# Altium PCB powerdriver.PcbDoc (part 2 of 2)
Units mil, origin at the board's own origin, x right, y up, seen from the top; angles counter-clockwise.
Board outline 9161.49 x 7551.49 mil, 2 copper layers (Top Layer, Bottom Layer); 98 components, 95 nets, 352 pads, 131 vias.
Unrouted connection lines stored in the file: 6.
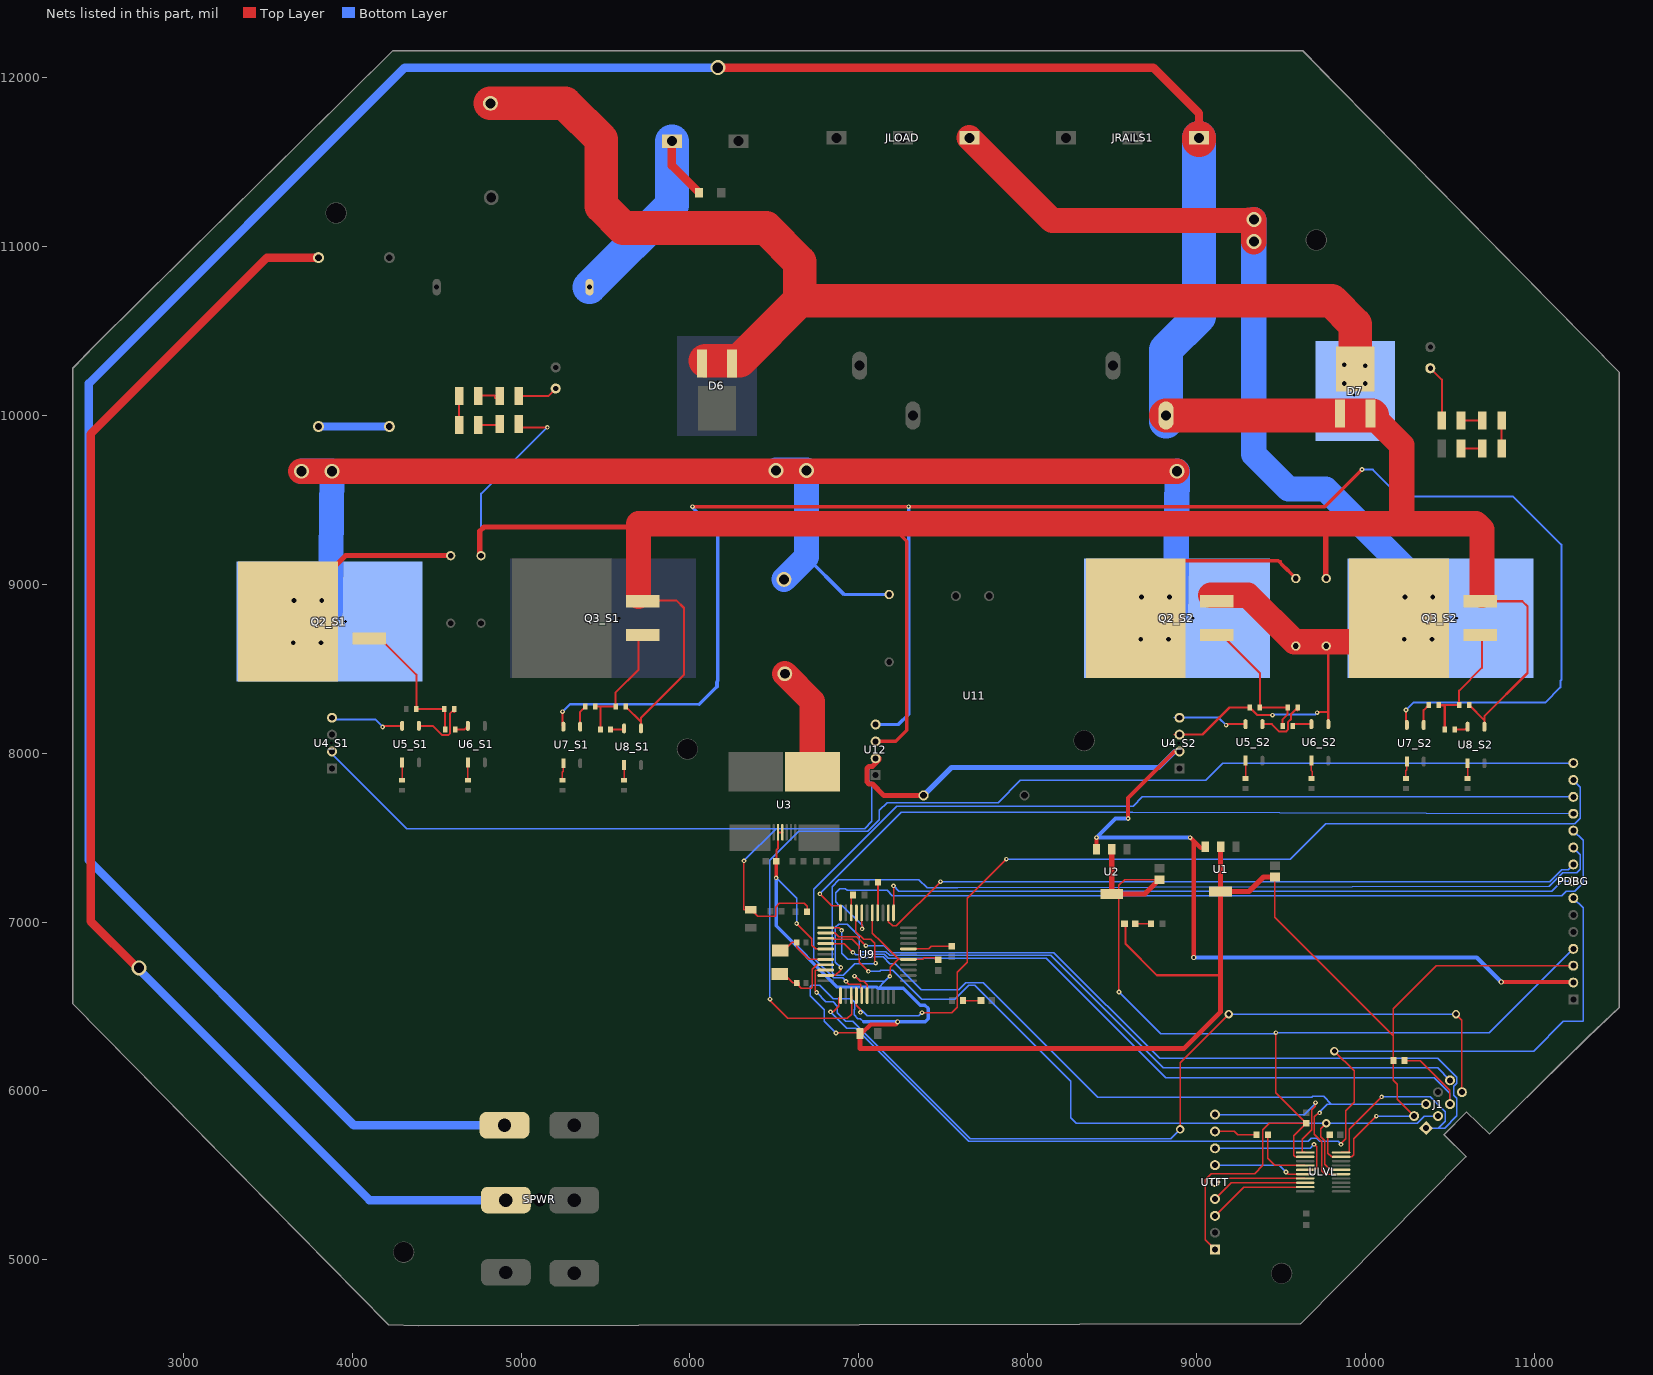
[diagram p2: the nets of this part, all layers, seen from the top]

## Via types
v1: diameter 27.56, hole 11.81, Top Layer to Bottom Layer, 85 vias
v2: diameter 50, hole 28, Top Layer to Bottom Layer, 29 vias
v3: diameter 88.58, hole 60, Top Layer to Bottom Layer, 14 vias
v4: diameter 30, hole 15, Top Layer to Bottom Layer, 3 vias

## Nets (pads, with @x,y where several pads share a name; then routed paths per layer and width w, separated by ;. In a path a pad name is that pad's centre, name@x,y a point inside that pad or via, vN(x,y) a via of type N, cw(c..) or ccw(c..) an arc to the next point about the centre after c; other vN are vias at no path point) (continued)
LOAD_S2: D1_S2.1 D2_S2.2 JLOAD.1 Q2_S2.3 Q3_S2.2 R7_S2.1 U4_S2.3 U6_S2.3 | length 8983.2
  Top Layer w8: Q2_S2.3@9085,8935 9085,8901.02 Q2_S2.3@9110.71,8901.02 ; D2_S2.2@9768.43,8635 9793.43,8660 9910,8660 10210.55,8660 10210.55,8800.63 10233.92,8800.63 10233.92,8914 Q3_S2.2@10245.55,8925.63 ; U6_S2.3@9780.55,8154.45 U6_S2.3@9780.55,8172.17 U6_S2.3@9780.55,8185
  Top Layer w12: U4_S2.3@8870.55,8110.63 9035.55,8110.63 9195.55,8270.63 R7_S2.1@9316.02,8270.63 9361.65,8225 v1(9450,8225) ; v1(9715,8240) 9720,8245 9780.55,8245 ; U6_S2.3@9780.55,8185 9780.55,8245 ; D2_S2.2@9780.55,8635 9780.55,8245
  Top Layer w25: D2_S2.2@9768.43,8635 D2_S2.2@9780.55,8635
  Top Layer w150: JLOAD.1@7655,11645 8145,11155 9260,11155 v3(9340,11160) v3(9340,11030) ; Q2_S2.3@9085,8935 9110.71,8935 9305,8935 9580,8660 9588.43,8660 9768.43,8660 9793.43,8660 Q3_S2.2@9910,8660
  Bottom Layer w8: D1_S2.1@9588.43,8635 D2_S2.2@9768.43,8635 ; Q3_S2.2@10245.55,8925.63 Q3_S2.2@10385.55,8925.63 ; Q3_S2.2@10385.55,8910 Q3_S2.2@10385.55,8925.63 ; Q3_S2.2@10405.55,8675.63 10356.92,8627 10289.18,8627 10285.55,8630.63 10240.55,8675.63 10365.55,8800.63 10455.55,8800.63 Q3_S2.2@10550.55,8800.63 ; Q3_S2.2@10410.55,8925.63 Q3_S2.2@10385.55,8925.63
  Bottom Layer w12: v1(9450,8225) 9455,8230 9705,8230 v1(9715,8240)
  Bottom Layer w150: v3(9340,11160) v3(9340,11030) 9340,9770 9545,9565 9765,9565 10385.55,8944.45 Q3_S2.2@10385.55,8925.63
  other v2: 10230,8675 10395,8675 10235,8925 10400,8925
LOW_RAIL: C14.2 D2_S1.1 D2_S2.1 D7.1 D7.3 JRAILS1.1 Q3_S1.3 Q3_S2.3 R11_S1.1 R11_S2.1 R22.1 SPWR.2 U8_S1.3 U8_S2.3 U12.3 | length 31306.6
  Top Layer w8: D2_S1.1@4755,9170 D2_S1.1@4758.94,9173.94 ; Q3_S1.3@5695.16,8891.02 Q3_S1.3@5695.16,8905 ; Q3_S1.3@5695.16,8917.5 Q3_S1.3@5695.16,8905 ; Q3_S1.3@5695.16,8930 Q3_S1.3@5695.16,8905 ; 5695.16,9340 5900,9340 ; 9250,9350 9775.55,9350 ; 9765.55,9305 9775.55,9305 9775.55,9350 ; 9841.57,9920 D7.1@9841.57,10000 ; 10655.55,9350 9775.55,9350 ; Q3_S2.3@10690.71,8901.02 Q3_S2.3@10690.71,8935
  Top Layer w12: R22.1@5002.09,9930 v1(5155,9930) ; R11_S1.1@5619.53,8275.63 5710,8185.16 ; Q3_S1.3@5695.16,8905 5920,8905 5965,8860 5965,8465 5710,8210 5710,8185.16 ; U8_S1.3@5710,8147.17 5710,8185.16 ; R11_S2.1@10615.08,8285.63 10705.55,8195.16 ; Q3_S2.3@10690.71,8901.02 10690.71,8900 10930.55,8900 10960.55,8870 10960.55,8475 10705.55,8220 10705.55,8195.16 ; U8_S2.3@10705.55,8157.17 10705.55,8195.16
  Top Layer w20: U12.3@7120,8070 7220,8070 7285,8135 7285,9255 7180,9360
  Top Layer w30: D2_S1.1@4755,9170 4755,9315 4780,9340 4987.09,9340 5695.16,9340 ; 9765.55,9305 9765.55,9035 D2_S2.1@9768.43,9035 ; 9765.55,9360 9775.55,9350 ; 10655.55,9350 10690.71,9314.84
  Top Layer w50: v3(6165,12060) 8745,12060 9015,11790 JRAILS1.1@9015,11645
  Top Layer w150: Q3_S1.3@5695.16,8930 5695.16,9340 5695.16,9360 7180,9360 9765.55,9360 10655.71,9360 10690.71,9325 10690.71,9314.84 Q3_S2.3@10690.71,8935 ; D7.3@10040,10000 10215,9825 10215,9385
  Top Layer w200: C14.2@8820,10000 9841.57,10000 D7.3@10038.43,10000 ; JRAILS1.1@9015,11630 JRAILS1.1@9015,11645 ; D7.3@10038.43,9998.43 D7.3@10038.43,10000 ; D7.3@10040,10000 D7.3@10038.43,10000
  Bottom Layer w12: D2_S1.1@4762.87,9170 4762.87,9537.87 v1(5155,9930)
  Bottom Layer w50: SPWR.2@4881.61,5796.54 4008.46,5796.54 2440,7365 2440,10190 4310,12060 v3(6165,12060)
  Bottom Layer w200: C14.2@8820,9965 C14.2@8820,10000 8820,10390 9015,10585 JRAILS1.1@9015,11645
LOW_RAIL+12: U7_S1.4 U7_S2.4 U12.4 | length 10974
  Top Layer w12: v1(5245,8245.63) 5245,8162.17 U7_S1.4@5250,8157.17 ; v1(10240.55,8255.63) 10240.55,8172.17 U7_S2.4@10245.55,8167.17
  Top Layer w20: v1(6015.55,9460) v1(7295,9460) 9760,9460 v1(9980,9680)
  Bottom Layer w8: 6160,8420 6160,8430 6165,8430
  Bottom Layer w12: v1@5250,8250.63 v1(5245,8245.63) 5289.37,8290 6055,8290 ; v1(9980,9680) 10045,9680 10205,9520 10875.55,9520 11160.55,9235 11160.55,8435 11155.55,8430 11155.55,8390.55 11065,8300 10284.92,8300 v1(10240.55,8255.63) v1@10245.55,8260.63
  Bottom Layer w20: v1@6010,9460 6012.78,9457.22 6165,9305 6165,8430 ; 6055,8290 6160,8395 ; U12.4@7120,8170 7235,8170 7295,8230 v1(7295,9460)
  Bottom Layer w25: 6160,8395 6160,8420
MISO: J1.1 U9.2 ULVL.20 | length 5532.5
  Top Layer w8: U9.2@6803.98,6935.7 6859,6935.7 6880.7,6914 6988,6914 v1(7042,6860) ; ULVL.20@9856.3,5635.16 9905,5635.16 9905,5773 v1(10097,5965)
  Bottom Layer w8: v1(7042,6860) 7152,6860 7193,6819 8156,6819 8782,6193 10429.99,6193 10542.95,6080.04 10542.95,6045.64 10525,6027.69 10525,5975 10543,5957 10543,5853 10470,5780 10432,5780 ; v1(10097,5965) 10384,5965 10473,5876 10473,5821 10432,5780 ; J1.1@10360,5780 10432,5780
MOSI: J1.4 U9.1 ULVL.15 | length 4723.7
  Top Layer w8: U9.1@6803.98,6966.7 6883.3,6966.7 v1(6899,6951) ; v1(9730,5870) 9723,5870 9699,5846 9699,5743.37 9743,5699.37 9743,5527.2 9763,5507.2 ULVL.15@9856.3,5507.2
  Bottom Layer w8: v1(6899,6951) 6899,6816 6936,6779 7007,6779 7017,6789 7079.67,6789 7084.25,6793.57 7143.43,6793.57 7184,6753 7216,6753 7370.45,6598.55 7591.89,6598.55 7634.34,6641 7736,6641 8416,5961 9683.67,5961 9689.67,5967 9753,5967 9798.58,5921.42 ; v1(9730,5870) 9723,5870 9726.5,5873.5 9774.42,5921.42 9798.58,5921.42 ; J1.4@10360,5921.42 9798.58,5921.42
NetC7_2: C7.2 U9.7 X1.2 | length 349.6
  Top Layer w8: X1.2@6533.94,6831.58 6558,6831.58 6606.42,6880 C7.2@6632.44,6880 6632.44,6850 6703.74,6778.7 U9.7@6803.98,6778.7
NetC8_2: C8.2 U9.8 X1.1 | length 437.7
  Top Layer w8: X1.1@6532.95,6692.8 6556,6692.8 6608.8,6640 C8.2@6632.44,6640 6648.44,6640 6648.44,6618.56 6659,6608 6717,6608 6724,6615 6724,6720 6750.7,6746.7 U9.8@6803.98,6746.7
NetC11_1: C11.1 U9.29 | length 262.6
  Top Layer w8: U9.29@7293.98,6840.7 7414,6840.7 7429.8,6856.5 C11.1@7550,6856.5
NetD1_S1_2: D1_S1.2 D1_S2.2 D3.1 L1.1 Q2_S1.2 Q2_S2.2 | length 13288.7
  Top Layer w8: Q2_S1.2@3665,8665.63 3635,8695.63 3635,8790.63 3635,8883 3670,8883 Q2_S1.2@3670,8915.63 ; Q2_S1.2@3860,8905.63 Q2_S1.2@3860,9070 ; 4460,9670 4883,9670 ; v3@6510,9670 6505,9670 v3(6510,9675) ; Q2_S2.2@8660.55,8675.63 8660.55,8675 8630.55,8675 8630.55,8800.63 8630.55,8893 8665.55,8893 Q2_S2.2@8665.55,8925.63 ; Q2_S2.2@8825.55,8675.63 8825.55,8800.63 Q2_S2.2@8825.55,8925.63 ; Q2_S2.2@8830.55,8925.63 8895.55,8990.63 Q2_S2.2@8895.55,9105 ; Q2_S2.2@8910.55,9120 Q2_S2.2@8910.55,9140 ; Q2_S2.2@8931.38,9101.63 Q2_S2.2@8931.46,9101.54 ; 9485,9140 9503.43,9140 9503.43,9121.57 9503.43,9120
  Top Layer w20: Q2_S2.2@8895.55,9105 Q2_S2.2@8910.55,9120 ; Q2_S2.2@8910.55,9140 9485,9140 9503.43,9121.57 9545,9080 ; 9503.43,9120 D1_S2.2@9588.43,9035
  Top Layer w30: Q2_S1.2@3860,9070 3960,9170 D1_S1.2@4582.87,9170 D1_S1.2@4590,9170
  Top Layer w150: v3@3695,9670 v3(3700,9670) v3(3880,9670) 4883,9670 v3@6505,9670 ; v3@6510,9670 6690,9670 8344,9670 v3@8884.95,9670
  Bottom Layer w8: Q2_S1.2@3665,8665.63 Q2_S1.2@3830,8665.63 ; Q2_S1.2@3670,8915.63 3835,8915.63 3870,8915.63 3870,8840 3880,8830 Q2_S1.2@3880,8790.63 ; Q2_S2.2@8660.55,8675.63 Q2_S2.2@8825.55,8675.63 ; Q2_S2.2@8830.55,8925.63 8830.55,9615 v3(8885.55,9670) ; Q2_S2.2@8875.55,8800.63 8893,8800.63 8893,8840 Q2_S2.2@8875.55,8840
  Bottom Layer w20: 6690,9162.48 6912.48,8940 D3.1@7180,8940
  Bottom Layer w150: v3(3700,9670) v3(3880,9670) 3870.91,8915.2 Q2_S1.2@3870,8840 ; v3(6510,9675) v3(6690,9675) 6690,9162.48 L1.1@6556.89,9029.37 ; Q2_S2.2@8875.55,8840 8876.57,8924.56 Q2_S2.2@8876.58,8925.07 ; Q2_S2.2@8876.58,8925.08 v3(8885.55,9670)
  other v2: 3650,8655 3815,8655 8670,8675 8835,8675 3655,8905 3820,8905 8675,8925 8840,8925
NetD4_2: D4.2 R13.1 | length 105
  Top Layer w8: R13.1@7618.46,6535 D4.2@7723.5,6535
NetD5_1: D5.1 F1.2 J_ACPWR1.2 | length 1438.5
  Top Layer w50: J_ACPWR1.2@5893.15,11625 5893.15,11480.51 D5.1@6053.66,11320
  Bottom Layer w200: F1.2@5405.51,10760 5893.15,11247.64 J_ACPWR1.2@5893.15,11625
NetD6_1: D6.1 D6.3 D7.4 L2.1 | length 7274.7
  Top Layer w8: D6.3@6090,10325 6081.57,10316.57 6081.57,10307.48 6099.09,10325 6148,10373.91 6212,10373.91 6260.91,10325 D6.1@6278.43,10307.48
  Top Layer w200: L2.1@4818.15,11849.37 5260.63,11849.37 5475,11635 5475,11240 5605,11110 6450,11110 6650,10910 6650,10680 ; D6.3@6090,10325 6099.09,10325 6260.91,10325 6295,10325 6650,10680 ; D7.4@9940,10275.55 9940,10540 9800,10680 6650,10680
  other v2: 9875,10190 10000,10190 10000,10295 9875,10300
NetD8_2: D8.2 R28.1 | length 95
  Top Layer w8: D8.2@8636.5,6990 R28.1@8731.54,6990
NetDLAMPHI_2: DLAMPHI.2 R21.2 | length 338.1
  Top Layer w12: DLAMPHI.2@10385,10280 10452.91,10212.09 R21.2@10452.91,9970
NetDLAMPLO_2: DLAMPLO.2 R25.1 | length 236.6
  Top Layer w8: R25.1@4987.09,10115 R25.1@4997.09,10115
  Top Layer w12: R25.1@4997.09,10115 5160,10115 DLAMPLO.2@5205,10160
NetL1_2: L1.2 U3.9 | length 648.2
  Top Layer w150: L1.2@6561.89,8470.63 6725,8307.52 U3.9@6725,7890
NetQ2_S1_1: Q2_S1.1 R5_S1.2 R7_S1.2 R29_S1.2 | length 827.7
  Top Layer w12: Q2_S1.1@4137.38,8707.38 4379.53,8465.24 R7_S1.2@4379.53,8260.63 R5_S1.2@4545,8260.63 ; R29_S1.2@4550.47,8140 R5_S1.2@4550.47,8255.16
NetQ2_S2_1: Q2_S2.1 R5_S2.2 R7_S2.2 R29_S2.2 | length 856.9
  Top Layer w8: Q2_S2.1@9110.71,8700.24 9145.16,8700.24 Q2_S2.1@9145.16,8705.16
  Top Layer w12: Q2_S2.1@9145.16,8705.16 9375.08,8475.24 R7_S2.2@9375.08,8270.63 9540,8270.63 9540,8230 9510.47,8200.47 R29_S2.2@9510.47,8160
NetQ3_S1_1: Q3_S1.1 R9_S1.2 R11_S1.2 R30_S1.2 | length 760.9
  Top Layer w12: R9_S1.2@5439.53,8275.63 R11_S1.2@5560.47,8275.63 5560.47,8360.47 5695.16,8495.16 5695.16,8690.24 Q3_S1.1@5695.16,8729.61 ; R30_S1.2@5470.47,8140 5470.47,8270.16
NetQ3_S2_1: Q3_S2.1 R9_S2.2 R11_S2.2 R30_S2.2 | length 772.4
  Top Layer w8: R9_S2.2@10435.08,8285.63 10435.08,8282 10470.47,8282 10470.47,8280.16
  Top Layer w12: R9_S2.2@10435.08,8285.63 R11_S2.2@10556.02,8285.63 10556.02,8370.47 10690.71,8505.16 Q3_S2.1@10690.71,8700.24 ; R30_S2.2@10470.47,8140 10470.47,8280.16
NetR1_2: R1.2 U9.37 | length 180.9
  Top Layer w10: U9.37@7111.98,7054.7 7113.46,7056.19 R1.2@7113.46,7235
NetR4_S1_2: R4_S1.2 U5_S1.1 | length 105.5
  Top Layer w8: R4_S1.2@4295,7840.16 U5_S1.1@4295,7945.63
NetR4_S2_2: R4_S2.2 U5_S2.1 | length 105.5
  Top Layer w8: R4_S2.2@9290.55,7850.16 U5_S2.1@9290.55,7955.63
NetR5_S1_1: R5_S1.1 U5_S1.3 | length 381.3
  Top Layer w12: U5_S1.3@4395,8162.17 4477.01,8162.17 4530.89,8108.28 4570.05,8108.28 4578.25,8116.48 4578.25,8234.83 R5_S1.1@4604.06,8260.63 R5_S1.1@4604.06,8243.11
NetR5_S2_1: R5_S2.1 U5_S2.3 | length 346.4
  Top Layer w12: U5_S2.3@9390.55,8172.17 9447.01,8172.17 9490.89,8128.28 9530.05,8128.28 9541.75,8139.98 9541.75,8183.52 9560,8201.77 9560,8231.02 R5_S2.1@9599.61,8270.63 R5_S2.1@9599.61,8253.11
NetR6_S1_2: R6_S1.2 U6_S1.1 | length 105.5
  Top Layer w8: R6_S1.2@4685,7840.16 U6_S1.1@4685,7945.63
NetR6_S2_2: R6_S2.2 U6_S2.1 | length 111
  Top Layer w8: R6_S2.2@9680.55,7850.16 9684.45,7850.16 9684.45,7891.94 9680.55,7895.84 U6_S2.1@9680.55,7955.63
NetR8_S1_2: R8_S1.2 U7_S1.1 | length 102.5
  Top Layer w8: R8_S1.2@5245,7840.16 5245,7887 5250,7892 U7_S1.1@5250,7940.63
NetR8_S2_2: R8_S2.2 U7_S2.1 | length 102.5
  Top Layer w8: R8_S2.2@10240.55,7850.16 10240.55,7897 10245.55,7902 U7_S2.1@10245.55,7950.63
NetR9_S1_1: R9_S1.1 U7_S1.3 | length 131.1
  Top Layer w12: U7_S1.3@5350,8157.17 5350,8245.16 R9_S1.1@5380.47,8275.63
NetR9_S2_1: R9_S2.1 U7_S2.3 | length 131.1
  Top Layer w12: U7_S2.3@10345.55,8167.17 10345.55,8255.16 R9_S2.1@10376.02,8285.63
NetR10_S1_2: R10_S1.2 U8_S1.1 | length 90.5
  Top Layer w8: R10_S1.2@5610,7840.16 U8_S1.1@5610,7930.63
NetR10_S2_2: R10_S2.2 U8_S2.1 | length 90.5
  Top Layer w8: R10_S2.2@10605.55,7850.16 U8_S2.1@10605.55,7940.63
NetR14_1: R14.1 UTFT.8 | length 254.8
  Top Layer w8: UTFT.8@9110,5760 9223,5760 9243,5740 R14.1@9356.54,5740
NetR14_2: R14.2 ULVL.4 | length 377.5
  Top Layer w8: R14.2@9423.46,5740 9423.46,5600 9465.08,5558.39 ULVL.4@9643.7,5558.39
NetR15_2: R15.2 R27.1 | length 420
  Bottom Layer w50: R27.1@3800,9935 R15.2@4220,9935
NetR17_1: R17.1 U9.42 | length 110.1
  Top Layer w10: U9.42@6954.98,7054.7 6954.98,7148.44 R17.1@6966.54,7160
NetR18_1: R18.1 R19.2 | length 125.8
  Top Layer w12: R18.1@10567.09,9805 R19.2@10692.91,9805
NetR19_1: R19.1 R20.2 | length 165
  Top Layer w12: R19.1@10807.09,9805 R20.2@10807.09,9970
NetR20_1: R20.1 R21.1 | length 125.8
  Top Layer w12: R21.1@10567.09,9970 R20.1@10692.91,9970
NetR22_2: R22.2 R23.2 | length 140.2
  Top Layer w8: R23.2@4747.09,9945 R23.2@4752.09,9945 ; R22.2@4872.91,9935.67 4872.91,9945 R22.2@4872.91,9950
  Top Layer w12: R23.2@4752.09,9945 R22.2@4872.91,9945
NetR23_1: R23.1 R24.2 | length 202.3
  Top Layer w8: R23.1@4632.91,9917.72 R23.1@4632.91,9945 R23.1@4632.91,9950
  Top Layer w12: R23.1@4632.91,9950 R24.2@4632.91,10115 R24.2@4632.91,10120
NetR24_1: R24.1 R25.2 | length 159.8
  Top Layer w8: R24.1@4747.09,10115 R24.1@4747.09,10120 ; 4845,10120 4845,10115 4845,10103 4872.91,10103 R25.2@4872.91,10115
  Top Layer w12: R24.1@4747.09,10120 4845,10120
NetR27_2: R27.2 SPWR.1 | length 7789.6
  Top Layer w50: v3@2727.5,6727.5 2450,7005 2450,9890 3495,10935 R27.2@3800,10935
  Bottom Layer w50: v3(2735.95,6729.05) 2735.95,6719.05 4101.85,5353.15 SPWR.1@4889.49,5353.15
NetR29_S1_1: R29_S1.1 U6_S1.4 | length 84.7
  Top Layer w12: R29_S1.1@4609.53,8140 4662.83,8140 U6_S1.4@4685,8162.17
NetR29_S2_1: R29_S2.1 U6_S2.4 | length 116.1
  Top Layer w12: R29_S2.1@9569.53,8160 9581.69,8172.17 U6_S2.4@9680.55,8172.17
NetR30_S1_1: R30_S1.1 U8_S1.4 | length 87.6
  Top Layer w8: U8_S1.4@5602.83,8140 5610,8140 U8_S1.4@5610,8147.17
  Top Layer w12: R30_S1.1@5529.53,8140 U8_S1.4@5602.83,8140
NetR30_S2_1: R30_S2.1 U8_S2.4 | length 83.1
  Top Layer w12: R30_S2.1@10529.53,8140 10588.39,8140 U8_S2.4@10605.55,8157.17
NetU4_S1_4: U4_S1.4 U5_S1.4 | length 456.3
  Top Layer w12: v1(4180,8155.63) 4186.54,8162.17 U5_S1.4@4295,8162.17
  Bottom Layer w12: U4_S1.4@3875,8200.63 3880,8200.63 4090,8200.63 ; 4105,8200.63 4090,8200.63 ; v1(4180,8155.63) 4135,8200.63 4090,8200.63
NetU4_S2_4: U4_S2.4 U5_S2.4 | length 456.3
  Top Layer w12: v1(9175.55,8165.63) 9182.09,8172.17 U5_S2.4@9290.55,8172.17
  Bottom Layer w12: U4_S2.4@8870.55,8210.63 9085.55,8210.63 ; 9100.55,8210.63 9085.55,8210.63 ; v1(9175.55,8165.63) 9130.55,8210.63 9085.55,8210.63
NetULVL_1: ULVL.1 UTFT.9 | length 970.2
  Top Layer w8: ULVL.1@9643.7,5635.16 9627,5635.16 9627,5715 9683,5771 9683,5888 9703,5908 9703,5924 9705,5926 v1(9705,5930)
  Bottom Layer w8: UTFT.9@9110,5860 9639,5860 9705,5926 v1(9705,5930)
NetULVL_5: ULVL.5 UTFT.7 | length 812.7
  Top Layer w8: ULVL.5@9643.7,5532.8 9699.8,5532.8 9711,5544 9711,5668 v1(9696,5683)
  Bottom Layer w8: UTFT.7@9110,5660 9673,5660 v1(9696,5683)
NetULVL_6: ULVL.6 UTFT.6 | length 555.6
  Top Layer w8: v1(9530,5520) 9542.8,5507.2 ULVL.6@9643.7,5507.2
  Bottom Layer w8: UTFT.6@9110,5560 9490,5560 v1(9530,5520)
NetULVL_7: ULVL.7 UTFT.5 | length 542.7
  Top Layer w8: UTFT.5@9110,5460 9131.61,5481.61 ULVL.7@9643.7,5481.61
NetULVL_8: ULVL.8 UTFT.4 | length 573.5
  Top Layer w8: UTFT.4@9110,5360 9206.02,5456.02 ULVL.8@9643.7,5456.02
NetULVL_9: ULVL.9 UTFT.3 | length 604.3
  Top Layer w8: UTFT.3@9110,5260 9280.43,5430.43 ULVL.9@9643.7,5430.43
PIN_EXTRA1: PDBG.15 U9.14 | length 6506.7
  Top Layer w8: v1(6474,6543) 6474,6536 6579.38,6430.62 6932.95,6430.62 6957,6454.67 6957,6562.68 U9.14@6954.98,6564.7
  Bottom Layer w8: v1(6474,6543) 6474,7367 6644,7537 7052,7537 7121,7606 7121,7661 7168,7708 7825,7708 7956,7839 9054,7839 9156,7941 11231.83,7941 PDBG.15@11231.83,7941.43
PIN_EXTRA2: PDBG.14 U9.15 | length 5477.7
  Top Layer w8: U9.15@6985.98,6564.7 6985.98,6508.02 7012,6482 7010,6480 v1(7010,6465) ; v1(7374,6463) 7550,6463 7583,6496 7583,6704 7642,6763 7642,7140 v1(7874,7372)
  Bottom Layer w8: v1(7010,6465) 7010,6480 7012,6482 7019.5,6474.5 7049.78,6444.22 7355.22,6444.22 v1(7374,6463) ; v1(7874,7372) 9555,7372 9766,7583 11241,7583 11274,7616 11274,7799.25 PDBG.14@11231.83,7841.43
PIN_EXTRA3: PDBG.13 U9.16 | length 5544.5
  Top Layer w8: v1(6924.04,6648.66) 6941,6631.7 7010.28,6631.7 U9.16@7017.98,6564.7
  Bottom Layer w8: v1(6924.04,6648.66) 6904.04,6668.66 6850.29,6668.66 6732,6786.94 6732,7194 7225,7687 8625,7687 8680,7742 11231.83,7742 PDBG.13@11231.83,7741.43
PIN_EXTRA4: PDBG.12 U9.44 | length 4857.4
  Top Layer w8: v1(6769,7167) 6839,7097 6891.98,7097 U9.44@6891.98,7054.7
  Bottom Layer w8: v1(6769,7167) 7252.6,7650.6 8623.28,7650.6 PDBG.12@11231.83,7641.43
PIN_EXTRA5: PDBG.11 U9.40 | length 5206.8
  Top Layer w8: U9.40@7017.98,7054.7 7017.98,6982.02 7023,6977 7020,6974 v1(7020,6960)
  Bottom Layer w8: v1(7020,6960) 7020,6974 7023,6977 6902,7098 6884.67,7098 6863,7119.67 6863,7173 6887,7197 6920.33,7197 6930.33,7187 7168,7187 7198,7157 11164.04,7157 11190,7182.96 11240.96,7182.96 11290,7232 11290,7483.25 PDBG.11@11231.83,7541.43
PIN_EXTRA6: PDBG.10 U9.41 | length 5843.8
  Top Layer w8: U9.41@6985.98,7054.7 6983,7051.72 6983,6942.98 7028.98,6897 7071,6897 7095,6873 7095,6756.57 7095,6752 v1(7099.57,6756.57)
  Bottom Layer w8: v1(7099.57,6756.57) 7095,6752 6975.3,6752 6908.96,6685.66 6908.72,6685.66 6908.06,6685 6857.16,6685 6841.49,6700.67 6841.49,7210.49 6882,7251 7356,7251 7405,7202 7586,7202 11089,7211 11169,7291 11253,7291 11274,7312 11274,7399.25 PDBG.10@11231.83,7441.43
PIN_EXTRA7: PDBG.9 U9.35 | length 4269.4
  Top Layer w8: U9.35@7174.98,7054.7 7174.98,7003.02 7200,6978 7223,6978 v1(7484,7239)
  Bottom Layer w8: v1(7484,7239) 11091.36,7239 11162.47,7310.11 11200.51,7310.11 PDBG.9@11231.83,7341.43
PIN_EXTRA8: PDBG.8 U9.34 | length 4223
  Top Layer w8: U9.34@7205.98,7054.7 v1(7205.98,7214)
  Bottom Layer w8: v1(7205.98,7214) 7237.98,7182 11104.57,7182 11164,7241.43 PDBG.8@11231.83,7241.43
PIN_EXTRA9: PDBG.7 U9.12 | length 6420.3
  Top Layer w8: v1(6832,6468) 6848,6468 6880.98,6500.98 6880.98,6548.7 U9.12@6891.98,6564.7 ; v2(9817,6236) 9934,6119 9934,5933 9884,5883 9884,5716 v1@9855,5687
  Bottom Layer w8: v1(6832,6468) 6928.4,6371.6 6982.17,6371.6 7651.76,5702 9662.67,5702 9680.67,5720 9711.33,5720 9729.33,5702 9840,5702 v1@9855,5687 ; v2(9817,6236) 10996.71,6236 11172.06,6411.35 11289.35,6411.35 11289.35,7083.9 PDBG.7@11231.83,7141.43
  other v1: 9856,5683
RESET: J1.5 R12.2 U9.4 | length 4555.8
  Top Layer w8: U9.4@6803.98,6872.7 6913.3,6872.7 v1(6965,6821) ; R12.2@10233.46,6180 10325.53,6180 10501.42,6004.11 J1.5@10501.42,5921.42
  Bottom Layer w8: v1(6965,6821) 6981,6805 7073.05,6805 7077.62,6809.57 7151.09,6809.57 7173.66,6787 8109,6787 8817,6079 10407,6079 10501.42,5984.58 J1.5@10501.42,5921.42
RXD_FTDI: J1.8 U9.10 | length 4453.4
  Top Layer w8: U9.10@6803.98,6683.7 6861,6683.7 6893.3,6716 v1(6893.3,6731)
  Bottom Layer w8: v1(6893.3,6731) 6862,6762.3 6862,6970 6880,6988 6931,6988 7002,6917 7002,6829 7008,6823 7068.42,6823 7070.99,6825.57 7159.43,6825.57 7182,6803 8137.7,6803 8804.7,6136 10428.26,6136 J1.8@10501.42,6062.84
SCK: J1.3 U9.3 ULVL.16 | length 5273
  Top Layer w8: U9.3@6803.98,6903.7 6853,6903.7 6853,6898 6962,6898 7002,6858 7002,6763 v1(7057,6708) ; v2(9768,5809) 9736,5777 9736,5729 9759,5706 9759,5565.8 9792,5532.8 ULVL.16@9856.3,5532.8
  Bottom Layer w8: v1(7057,6708) 7123,6708 7131,6716 7200,6716 7374,6542 7567.34,6542 7650.34,6625 7687,6625 8256,6056 8256,5841 8288,5809 9736,5809 10306.31,5809 ; v2(9768,5809) 10306.31,5809 ; J1.3@10430.71,5850.71 10348.02,5850.71 10306.31,5809
TXD_FTDI: J1.7 U9.9 | length 5379.5
  Top Layer w8: v1(6750,6583) 6741,6592 6741,6713.7 U9.9@6803.98,6715.7 ; v2(8903,5772) 8903,6167 v2(9191,6455) ; v2(10537,6455) 10572.13,6419.87 J1.7@10572.13,5992.13
  Bottom Layer w8: v1(6750,6583) 6805.18,6527.82 6848,6527.82 6873.14,6502.68 6873.14,6464 6924.14,6413 6964.42,6413 7659.42,5718 8800,5718 8849,5718 v2(8903,5772) ; v2(9191,6455) v2(10537,6455)
V3: C1.2 C17.1 PDBG.4 U2.2 ULVL.2 UTFT.1 | length 6670
  Top Layer w8: v1(8541,6586) 8541,7165.62 8541,7216.54 8576,7251.54 C17.1@8780,7251.54 ; UTFT.1@9110,5060 9052.47,5117.53 9052.47,5474.47 9088,5510 9344,5510 9393,5559 9393,5770 9431.5,5808.5 C1.2@9650,5808.5 ; v1(9470,6345) 9470,5988.5 C1.2@9650,5808.5 ; ULVL.2@9643.7,5609.57 9584,5609.57 9576,5617.57 9576,5734.5 C1.2@9650,5808.5
  Top Layer w30: U2.2@8498.02,7431.37 U2.2@8498.02,7165.62 8541,7165.62 8694.09,7165.62 C17.1@8780,7251.54
  Bottom Layer w8: v1(8541,6586) 8788,6339 9464,6339 v1(9470,6345) 10735.4,6345 PDBG.4@11231.83,6841.43
V+12: C4.2 PDBG.2 R2.2 U1.3 U2.3 U4_S1.2 U4_S2.2 U11.4 U12.2 | length 11518.8
  Top Layer w8: v1(6320,7363) 6320,7073.15 C4.2@6360,7073.15 6400.15,7033 6507,7033 6507,7089 6528,7110 6677,7110 6693.46,7093.54 R2.2@6693.46,7060 ; 9025,7438 9052.47,7438 U1.3@9052.47,7446.37
  Top Layer w25: U2.3@8407.47,7431.37 v1(8407.47,7500) ; v1(8595,7613) 8595,7735.08 8869.96,8010.04 ; v1(8963,7500) 8984,7479 ; v4(8984,6790) 8984,7479 ; 9025,7438 8984,7479 ; v4(10805,6645) 11228.25,6645 PDBG.2@11231.83,6641.43
  Top Layer w30: U12.2@7120,7970 7120,7961.58 7080.95,7922.53 7060.95,7922.53 7047.47,7909.05 7047.47,7830.95 7060.95,7817.47 7080.95,7817.47 7148.42,7750 U11.4@7383.69,7750
  Bottom Layer w8: U4_S1.2@3875,8000.63 3882.82,7992.82 4322.63,7553 6510,7553 ; v1(6320,7363) 6510,7553 ; U12.2@7120,7970 7078,7928 7078,7911.53 7065.5,7911.53 7058.47,7904.5 7058.47,7835.5 7065.5,7828.47 7078,7828.47 7078,7595.97 7035.03,7553 6510,7553
  Bottom Layer w25: v1(8595,7613) 8520.47,7613 v1(8407.47,7500) v1(8963,7500) ; v4(8984,6790) 10660,6790 v4(10805,6645)
  Bottom Layer w30: U11.4@7383.69,7750 7549.69,7916 8775.92,7916 U4_S2.2@8870.55,8010.63
VCC: C2.2 C5.2 C9.2 C10.1 C12.1 D8.1 J1.2 PDBG.3 R12.1 U1.2 U3.3 U3.4 U9.5 U9.17 U9.27 U9.38 ULVL.19 | length 14193.5
  Top Layer w8: v1(6511,7262) v1@6511.5,7262.5 ; v1(6632,6991) 6722,6901 6722,6864 6745.3,6840.7 U9.5@6803.98,6840.7 ; v1(6865,6343) C9.2@7006.85,6343 ; v1@6979,6682 6978,6681 v1@6979,6680 ; v1@6981,6686 v1(6975,6680) v1@6979,6680 ; v1@6984,6682 6984,6680 v1@6979,6680 ; U9.17@7048.98,6564.7 7048.98,6629.02 7029,6649 7010,6649 v1@6979,6680 ; U9.38@7079.98,7054.7 7079.98,6934 7134.98,6879 7137.46,6879 7233.64,6782.82 7233.64,6780.34 ; v1(7184,6679) 7184.92,6679.92 7184.92,6731.62 7233.64,6780.34 ; C10.1@7470,6776.5 7454.32,6776.5 7454.32,6787.75 7389.05,6787.75 7380,6778.7 U9.27@7293.98,6778.7 ; 9143.02,6468.02 9143.02,6805 U1.2@9143.02,7180.62 ; C12.1@9465,7266.54 9465,7028 10166.54,6326.46 ; C2.2@9778.5,5750 9778.5,5631.5 9800.43,5609.57 ULVL.19@9856.3,5609.57 9920,5609.57 9931,5620.57 9931,5716 v1(10065.71,5850.71) ; J1.2@10289.29,5850.71 10189,5951 10189,6040.21 10166.54,6062.67 R12.1@10166.54,6180 10166.54,6326.46 ; PDBG.3@11231.83,6741.43 10421.54,6741.43 10166.54,6486.42 10166.54,6326.46 ; 7233.64,6780.34 U9.27@7293.98,6778.7 ; 7233.64,6780.34 7235.28,6778.7 U9.27@7293.98,6778.7
  Top Layer w12: C5.2@6511.5,7360 6511.5,7426.5 6521.61,7436.61 U3.3@6521.61,7531.22 U3.4@6547.2,7531.22 ; D8.1@8573.5,6990 8580,6983.5 8580,6870 8765,6685 9143.02,6685
  Top Layer w20: v1@6511.5,7262.5 C5.2@6511.5,7360
  Top Layer w25: C9.2@7006.85,6340 7017.03,6340 7071,6393.96 7218.96,6393.96 7230,6405 v4(7230,6409)
  Top Layer w30: C9.2@7006.85,6355 7006.85,6343 C9.2@7006.85,6340 7006.85,6250 8925,6250 9143.02,6468.02 U1.2@9143.02,7180.62 ; U1.2@9143.02,7446.37 U1.2@9143.02,7180.62 ; C12.1@9465,7266.54 9396.54,7266.54 9310.62,7180.62 U1.2@9143.02,7180.62
  Bottom Layer w8: v1(6511,7262) 6632,7141 v1(6632,6991) ; v1(6865,6343) 6794.78,6413.22 6794.78,6481.22 6713,6563 6713,6616.85 6721.85,6625.69 6769.38,6625.69 6848.08,6547 6952,6547 6975,6524 6975,6482.33 6973,6480.33 6973,6449.67 6994.67,6428 7009,6428 7028,6409 ; v1@6981,6686 v1(6975,6680) v1@6979,6680 ; 7113.81,6608.81 7153,6648 ; v1(7184,6679) 7153,6648 ; v1(10065.71,5850.71) J1.2@10289.29,5850.71 ; v1@6979,6680 7011,6648 7153,6648 ; v1@6979,6680 6978,6681 6979,6682 6984,6682 6984,6680 v1@6979,6680
  Bottom Layer w20: v1(6511,7262) 6511,6976.83 6872.83,6615 7107.62,6615 7113.81,6608.81 7262.26,6608.81 7363.9,6507.17 7392,6507.17 7411,6488.17 7411,6426 7394,6409 v4(7230,6409) 7028,6409
pads on no net: SPWR. SPWR.3 SPWR.4 U4_S1. U4_S2. U12. ULVL.3 ULVL.18

## Keep-outs
Keep-Out Layer:
  the board outline again, w10

## Silkscreen, mask and mechanical layers (free items; w line width, h text height)
Top Overlay:
  text "+" at 8205,11370 h30
  text "-" at 9010,11365 h30
  text "L" at 5870,11360 h30
  text "N" at 6260,11360 h30
  text "A" at 6835,11360 h30
  text "N" at 7235,11360 h30
  text "B" at 7635,11360 h30
  text "N" at 8605,11360 h30
  text "!! DANGER: HIGH VOLTAGE !!" at 7030,11005 h80
  text "D13 / PD5" at 10814.84,7921.43 h40
  text "D14 / PD6" at 10814.84,7821.9 h40
  text "D15 / PD7" at 10814.84,7722.38 h40
  text "D4 / PB4" at 10848.16,7622.86 h40
  text "D0 / PB0" at 10848.16,7523.33 h40
  text "D1 / PB1" at 10868.16,7423.81 h40
  text "D29 / A2 / PA2" at 10608.24,7324.28 h40
  text "D28 / A3 / PA3" at 10608.24,7224.76 h40
  text "D11 / A4 / PD3" at 10621.57,7125.24 h40
  text "DBG_LED" at 10888.15,7025.71 h40
  text "ANALOG_CURRENT" at 10608.24,6926.19 h40
  text "V3" at 11088.08,6820 h40
  text "V5" at 11088.08,6720.48 h40
  text "V12" at 11054.76,6620.95 h40
  text "With great power" at 3900,6550 h80
  text "GND" at 11048.1,6521.43 h40
  text "comes great responsibility." at 3925,6380 h80
Bottom Overlay:
  text "!! DANGER: HIGH VOLTAGE !!" at 8760,10950 h80
  text "Sean Purser-Haskell" at 8040,5475 h80
  text "16 AUG 2014" at 8040,5325 h80
Mechanical 1:
  circle w0.5: c5983.72,8026.6 r66.93
  circle w0.5: c5984.26,8024.61 r118.11
  circle w0.5: c5984.66,8030.33 r55.12
  circle w0.5: c8333.72,8076.6 r66.93
  circle w0.5: c8334.26,8074.61 r118.11
  circle w0.5: c8334.66,8080.33 r55.12
  circle w0.5: c9503.72,4921.6 r66.93
  circle w0.5: c9504.26,4919.61 r118.11
  circle w0.5: c9504.66,4925.33 r55.12
  circle w0.5: c4303.72,5046.6 r66.93
  circle w0.5: c4304.26,5044.61 r118.11
  circle w0.5: c4304.66,5050.33 r55.12
  circle w0.5: c9708.72,11041.6 r66.93
  circle w0.5: c9709.26,11039.61 r118.11
  circle w0.5: c9709.66,11045.33 r55.12
  circle w0.5: c3904.66,11205.33 r55.12
  circle w0.5: c3904.26,11199.61 r118.11
  circle w0.5: c3903.72,11201.6 r66.93
  lines w0.5: 3806.24,11205.33 3904.66,11205.33 ; 3904.66,11106.91 3904.66,11205.33 ; 3904.66,11303.76 3904.66,11205.33 ; 4058.21,11205.33 4003.09,11205.33 3904.66,11205.33 ; 4206.24,5050.33 4304.66,5050.33 ; 4304.66,4951.91 4304.66,5050.33 ; 4304.66,5148.76 4304.66,5050.33 ; 4458.21,5050.33 4403.09,5050.33 4304.66,5050.33 ; 5886.24,8030.33 5984.66,8030.33 ; 5984.66,7931.91 5984.66,8030.33 ; 5984.66,8128.76 5984.66,8030.33 ; 6138.21,8030.33 6083.09,8030.33 5984.66,8030.33 ; 8236.24,8080.33 8334.66,8080.33 ; 8334.66,7981.91 8334.66,8080.33 ; 8334.66,8178.76 8334.66,8080.33 ; 8433.09,8080.33 8334.66,8080.33 ; 8463.09,8160.33 8518.21,8160.33 ; 9406.24,4925.33 9504.66,4925.33 ; 9504.66,4826.91 9504.66,4925.33 ; 9504.66,5023.76 9504.66,4925.33 ; 9611.24,11045.33 9709.66,11045.33 ; 9658.21,4925.33 9603.09,4925.33 9504.66,4925.33 ; 9709.66,10946.91 9709.66,11045.33 ; 9709.66,11143.76 9709.66,11045.33 ; 9863.21,11045.33 9808.09,11045.33 9709.66,11045.33

## Text inside footprints (layer, text, board x,y; h text height)
C13: Top Overlay "GND" at 7950,10055 h30 r90
C14: Top Overlay "GND" at 9490,10040 h30 r90
J1: Top Overlay "2" at 10246.86,5780 h50 r45; Top Overlay "1" at 10317.57,5709.29 h50 r45; Top Overlay "7" at 10628.7,6020.42 h50 r45; Top Overlay "8" at 10557.99,6091.13 h50 r45